# EAGLE board Shield Schematic (EAGLE 9.6.2)
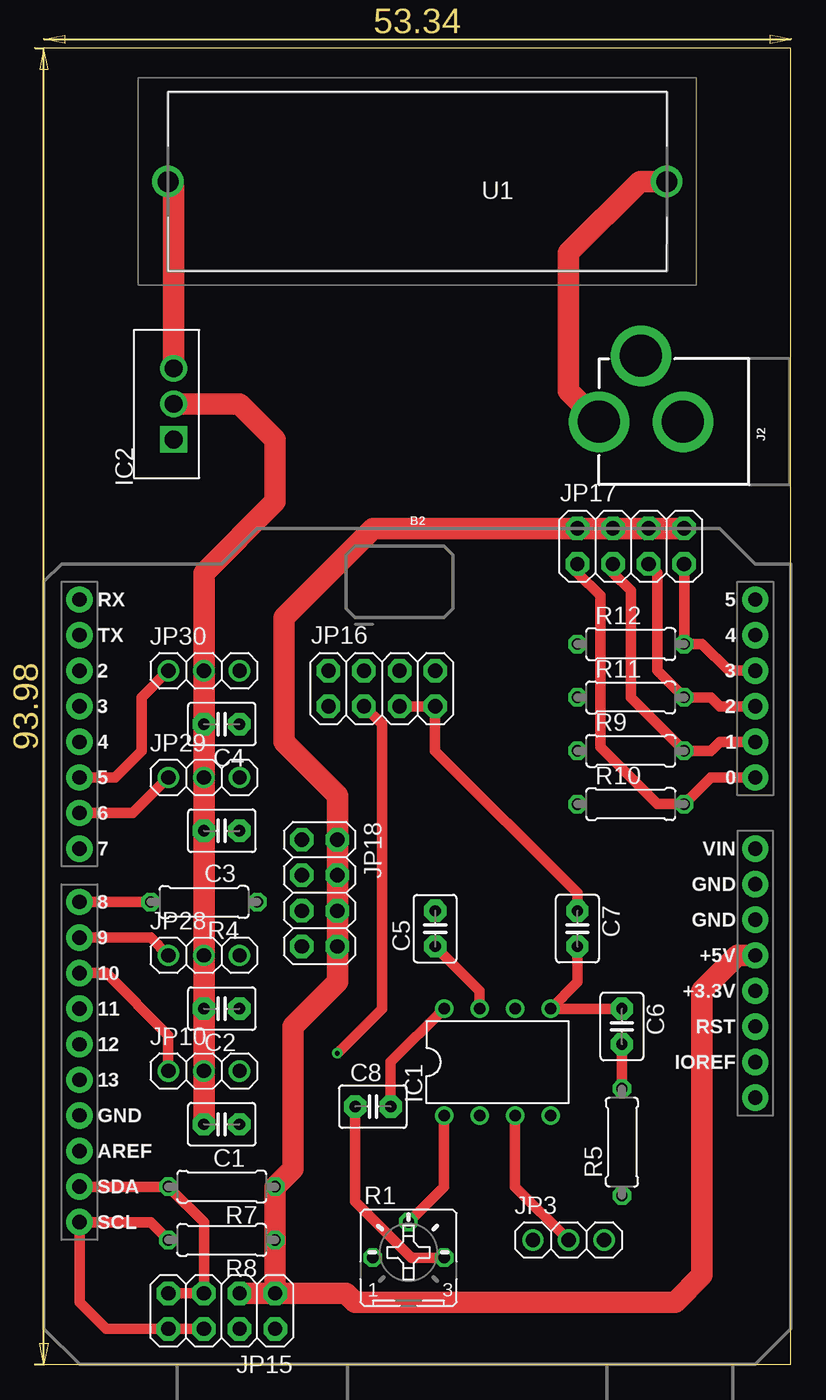
[diagram p0: board, top side]
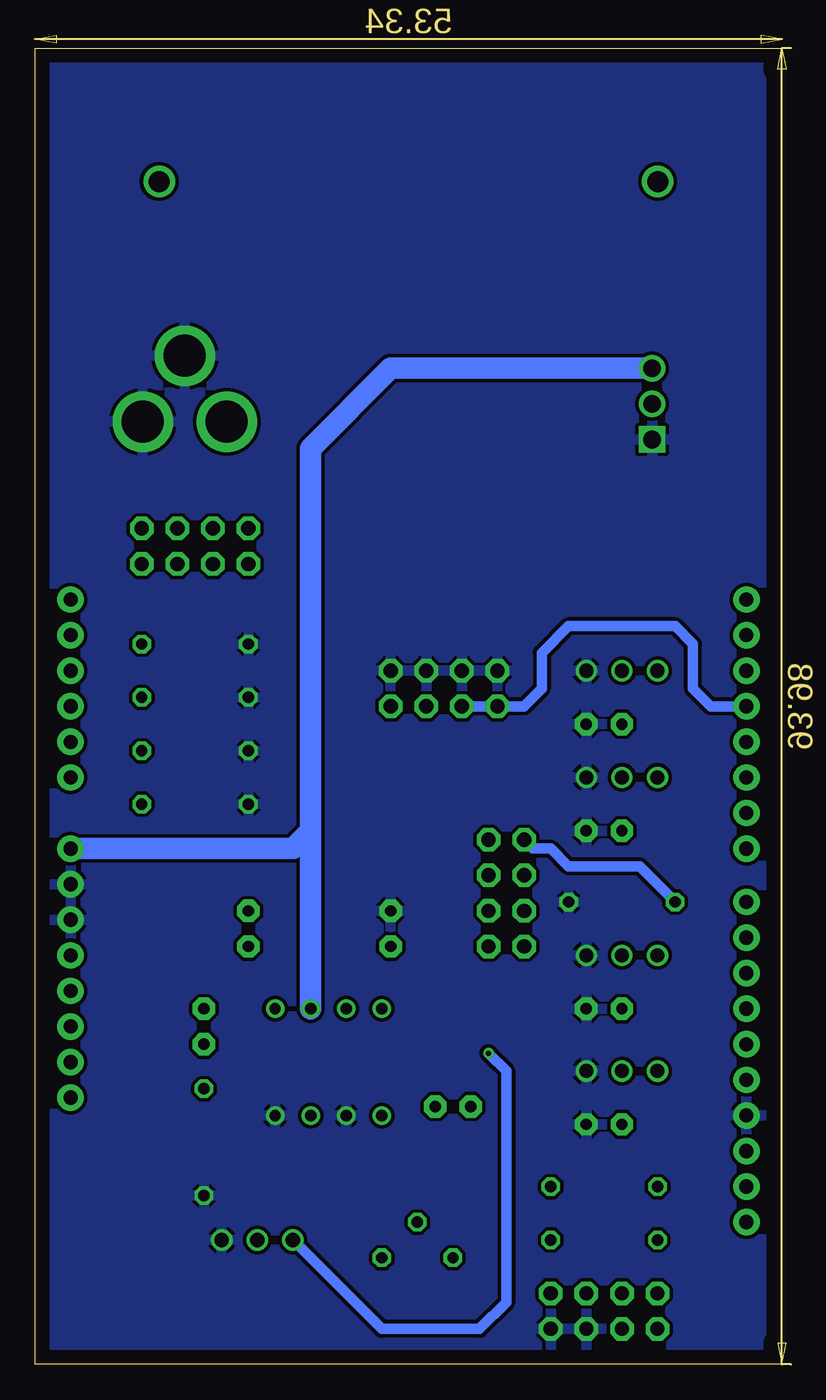
[diagram p1: board, bottom side, seen from below]

Size 53.34 x 93.98 mm. Coordinates in mm from the lower left corner, seen from the top.
Outline: 0,0 53.34,0 53.34,93.98 0,93.98 0,0
Copper layers (1*16): Top 0.035mm / dielectric 1.5mm / Bottom 0.035mm
Design rules "default": minimum track width 6mil, minimum drill 0.35mm, track to track 6mil, track to pad 6mil, pad to pad 6mil, via to via 6mil, smd to smd 6mil, copper to edge 40mil, drill to drill 6mil, minimum pad ring 10mil, minimum via ring 8mil, stop-mask expansion 4mil, vias tented up to drill 0mil, thermal gap 10mil
Net classes: 1 Signal: width 0.762 mm, clearance 0.152 mm; 2 Power: width 1.524 mm, clearance 0.254 mm; 3 Audio: width 0.762 mm, clearance 0.254 mm

## Footprints (pad centres in the part's own frame; a part is rotated, then mirrored left to right if it is on the bottom)
UNO_R3_SHIELD = drill 1.016 pad 1.88: 3.3V 24.13,-2.54; 5V 24.13,0; A0 24.13,12.7; A1 24.13,15.24; A2 24.13,17.78; A3 24.13,20.32; A4 24.13,22.86; A5 24.13,25.4; AREF -24.13,-13.97; D2 -24.13,20.32; D3 -24.13,17.78; D4 -24.13,15.24; D5 -24.13,12.7; D6 -24.13,10.16; D7 -24.13,7.62; D8 -24.13,3.81; D9 -24.13,1.27; D10 -24.13,-1.27; D11 -24.13,-3.81; D12 -24.13,-6.35; D13 -24.13,-8.89; GND@0 24.13,2.54; GND@1 24.13,5.08; GND@2 -24.13,-11.43; IOREF 24.13,-7.62; NC 24.13,-10.16; RES 24.13,-5.08; RX -24.13,25.4; SCL -24.13,-19.05; SDA -24.13,-16.51; TX -24.13,22.86; VIN 24.13,7.62
C2.5-3 = drill 0.813 pad 1.6 octagon: 1 -1.27,0; 2 1.27,0
DIL08 = drill 0.813 pad 1.27: 1 -3.81,-3.81; 2 -1.27,-3.81; 3 1.27,-3.81; 4 3.81,-3.81; 5 3.81,3.81; 6 1.27,3.81; 7 -1.27,3.81; 8 -3.81,3.81
TO254P470X1016X2222-3P = drill 1.27 pad 1.905 square: 1 -5.08,-1.016 | drill 1.27 pad 1.905: 2 -2.54,-1.016; 3 0,-1.016
POWER_JACK_PTH = drill 2.997 pad 4.318: GND 0,7.7; GNDBREAK 4.7,10.7; PWR 0,13.7
1X03 = drill 1.016: 1 -2.54,0; 2 0,0; 3 2.54,0
2X04 = drill 1.016 pad 1.676 octagon: 1 -3.81,-1.27; 2 -3.81,1.27; 3 -1.27,-1.27; 4 -1.27,1.27; 5 1.27,-1.27; 6 1.27,1.27; 7 3.81,-1.27; 8 3.81,1.27
B25P = drill 0.813 octagon: A -2.54,0; E 2.54,0; S 0,2.54
0207/7 = drill 0.813 octagon: 1 -3.81,0; 2 3.81,0
03540101ZXGY = drill 1.5 pad 2.25: 1 -17.8,0; 2 17.8,0

## Placement (x,y rotation side)
B2  ARDUINO_UNO_R3_SHIELDBASIC  [UNO_R3_SHIELD]  26.67,29.21 0 top
C1  [C2.5-3]  12.7,17.14 180 top
C2  [C2.5-3]  12.7,25.4 180 top
C3  [C2.5-3]  12.7,38.1 180 top
C4  [C2.5-3]  12.7,45.72 180 top
C5  [C2.5-3]  27.94,31.11 90 top
C6  [C2.5-3]  41.27,24.13 270 top
C7  [C2.5-3]  38.1,31.11 270 top
C8  [C2.5-3]  23.5,18.41 0 top
IC1  LM386N-1  [DIL08]  32.38,21.59 0 top
IC2  LM1085IT-5.0  [TO254P470X1016X2222-3P]  8.26,71.12 90 top
J2  POWER_JACK  [POWER_JACK_PTH]  53.34,67.31 90 top
JP3  [1X03]  37.47,8.89 0 top
JP10  [1X03]  11.43,20.95 0 top
JP15  [2X04]  12.7,3.81 180 top
JP16  [2X04]  24.13,48.26 0 top
JP17  [2X04]  41.91,58.42 0 top
JP18  [2X04]  19.68,33.66 270 top
JP28  [1X03]  11.43,29.21 0 top
JP29  [1X03]  11.43,41.91 0 top
JP30  [1X03]  11.43,49.53 0 top
R1  [B25P]  26.04,7.62 0 top
R4  [0207/7]  11.43,33.02 180 top
R5  [0207/7]  41.27,15.88 90 top
R7  [0207/7]  12.7,12.7 180 top
R8  [0207/7]  12.7,8.89 180 top
R9  [0207/7]  41.91,43.81 0 top
R10  [0207/7]  41.91,40.01 0 top
R11  [0207/7]  41.91,47.62 0 top
R12  [0207/7]  41.91,51.44 0 top
U1  03540001ZXGY  [03540101ZXGY]  26.67,84.45 180 top

## Library data of the parts
B2 = SparkFun-Boards
C1-C8 = capacitor-wima
IC1 = linear
IC2 = SamacSys_Parts; ARROW_PART_NUMBER: LM1085IT-5.0; ARROW_PRICE-STOCK: https://www.arrow.com/en/products/lm1085it-5.0/texas-instruments; DESCRIPTION: IC, LDO VOLT REG, 5V, 1.5A; HEIGHT: mm; MANUFACTURER_NAME: Texas Instruments; MANUFACTURER_PART_NUMBER: LM1085IT-5.0; MOUSER_PART_NUMBER: 926-LM1085IT-50; MOUSER_PRICE-STOCK: https://www.mouser.co.uk/ProductDetail/Texas-Instruments/LM1085IT-50?qs=X1J7HmVL2ZGujKIFphWZug%3D%3D
J2 = SparkFun-Connectors; PROD_ID: CONN-08197
JP3 JP10 JP15-JP18 JP28-JP30 = adafruit
R1 = pot
R4 R5 R7-R12 = resistor
U1 = SamacSys_Parts; ARROW_PART_NUMBER: 03540001ZXGY; ARROW_PRICE-STOCK: https://www.arrow.com/en/products/03540001zxgy/littelfuse; DESCRIPTION: Littelfuse 30A Panel Mount 6.3 x 32mm Cartridge Fuse Block, 300V ac/dc; HEIGHT: 13mm; MANUFACTURER_NAME: LITTELFUSE; MANUFACTURER_PART_NUMBER: 03540001ZXGY; MOUSER_PART_NUMBER: 576-03540001ZXGY; MOUSER_PRICE-STOCK: https://www.mouser.co.uk/ProductDetail/Littelfuse/03540001ZXGY?qs=2VFNtWizgieffhgauIF6XA%3D%3D

## Nets
+5V_SERVO [Power]: C1.2 C2.2 C3.2 C4.2 IC2.2 JP10.2 JP28.2 JP29.2 JP30.2
+5V_UNO [Power]: B2.5V JP15.1 JP15.3 JP17.2 JP17.4 JP17.6 JP17.8 JP18.2 JP18.4 JP18.6 JP18.8 R7.1 R8.1
+12V [Power]: B2.VIN IC1.6 IC2.3 U1.2
ACTION_BUTTON [Signal]: B2.A3 JP17.7 R12.2
GND [Power]: B2.GND@0 B2.GND@1 B2.GND@2 C1.1 C2.1 C3.1 C4.1 C5.2 IC1.2 IC1.4 IC2.1 J2.GND J2.GNDBREAK JP3.3 JP10.3 JP15.2 JP15.4 JP16.2 JP16.4 JP16.6 JP16.8 JP28.3 JP29.3 JP30.3 R4.1 R5.1 R9.1 R10.1 R11.1 R12.1
N$1 [Power]: J2.PWR U1.1
N$5 [Audio]: C6.1 C7.2 IC1.5
N$8 [Audio]: C6.2 R5.2
N$9 [Audio]: C5.1 IC1.7
N$11 [Audio]: C8.2 IC1.8
N$12 [Audio]: C8.1 R1.E
N$13 [Audio]: IC1.1 R1.S
PLAYLIVE_SWITCH [Signal]: B2.A1 JP17.3 R9.2
PLAYRECORDING_SWITCH [Signal]: B2.A2 JP17.5 R11.2
POT_OUT [Audio]: IC1.3 JP3.2
RECORD_SWITCH [Signal]: B2.A0 JP17.1 R10.2
RESET_BUTTON [Signal]: B2.D8 JP18.1 R4.2
SCL [Signal]: B2.SCL JP15.6 JP15.8 R8.2
SDA [Signal]: B2.SDA JP15.5 JP15.7 R7.2
SERVO1 [Signal]: B2.D5 JP30.1
SERVO2 [Signal]: B2.D6 JP29.1
SERVO3 [Signal]: B2.D9 JP28.1
SERVO4 [Signal]: B2.D10 JP10.1
SPEAKER [Audio]: C7.1 JP16.5 JP16.7
TONE_IN [Audio]: B2.D3 JP3.1 JP16.1 JP16.3

## Tracks (layer width: path | path; a pad name or v marks a point on that pad's centre or on a via)
+5V_SERVO
  Top 1.524: C1.2 JP10.2 C2.2 JP28.2 C3.2 JP29.2 C4.2 JP30.2 11.43,56.52 16.51,61.59 16.51,66.04 13.97,68.58 IC2.2
+5V_UNO
  Top 1.524: JP15.3 JP15.1 | JP15.1 R8.1 R7.1 17.78,13.97 17.78,24.13 20.95,27.3 JP18.8 JP18.6 JP18.4 JP18.2 20.95,40.64 17.14,44.45 17.14,53.34 23.5,59.69 JP17.2 JP17.4 JP17.6 JP17.8 | B2.5V 49.53,29.21 46.99,26.67 46.99,6.35 45.09,4.45 22.23,4.45 21.59,5.08 JP15.1
+12V
  Top 1.524: U1.2 9.27,84.05 IC2.3
  Bottom 1.524: 33.66,38.1 33.66,65.41 27.94,71.12 IC2.3 | 33.66,38.1 IC1.6 | B2.VIN 34.92,36.83 33.66,38.1
ACTION_BUTTON
  Top 0.762: B2.A3 48.9,49.53 46.99,51.44 R12.2 JP17.7
GND
  pour Bottom: 0,93.98 0,0 53.34,0 53.34,93.98
N$1
  Top 1.524: J2.PWR 37.47,69.48 37.47,79.38 42.55,84.45 U1.1
N$5
  Top 0.762: C6.1 IC1.5 38.1,27.3 C7.2
N$8
  Top 0.762: C6.2 R5.2
N$9
  Top 0.762: IC1.7 31.11,26.67 C5.1
N$11
  Top 0.762: IC1.8 24.77,21.59 C8.2
N$12
  Top 0.762: C8.1 22.23,11.65 26.25,7.62 R1.E
N$13
  Top 0.762: R1.S 28.57,12.7 IC1.1
PLAYLIVE_SWITCH
  Top 0.762: B2.A1 48.26,44.45 47.62,43.81 R9.2 41.91,47.62 41.91,55.24 40.64,56.52 JP17.3
PLAYRECORDING_SWITCH
  Top 0.762: B2.A2 48.26,46.99 47.62,47.62 R11.2 43.81,49.53 43.81,56.52 JP17.5
POT_OUT
  Top 0.762: IC1.3 33.66,12.7 JP3.2
RECORD_SWITCH
  Top 0.762: B2.A0 47.62,41.91 R10.2 43.81,40.01 39.73,44.09 39.73,54.89 38.1,56.52 JP17.1
RESET_BUTTON
  Top 0.762: B2.D8 R4.2
  Bottom 0.762: R4.2 10.16,35.56 15.24,35.56 16.51,36.83 17.78,36.83 JP18.1
SCL
  Top 0.762: R8.2 7.62,10.16 B2.SCL 2.54,4.45 4.45,2.54 JP15.8 JP15.6
SDA
  Top 0.762: B2.SDA R7.2 11.43,10.16 JP15.5 JP15.7
SERVO1
  Top 0.762: JP30.1 6.99,47.62 6.99,43.81 5.08,41.91 B2.D5
SERVO2
  Top 0.762: JP29.1 6.35,39.37 B2.D6
SERVO3
  Top 0.762: B2.D9 7.62,30.48 JP28.1
SERVO4
  Top 0.762: B2.D10 4.45,27.94 8.89,23.5 JP10.1
SPEAKER
  Top 0.762: C7.1 38.1,33.66 27.94,43.81 JP16.7 JP16.5
TONE_IN  (via drill 0.35)
  Top 0.762: JP16.3 24.13,45.72 24.13,25.4 v20.95,22.23
  Bottom 0.762: B2.D3 5.08,46.99 6.35,48.26 6.35,51.44 7.62,52.7 15.24,52.7 17.14,50.8 17.14,48.26 18.41,46.99 JP16.1 JP16.3 | v20.95,22.23 19.68,20.95 19.68,4.45 21.59,2.54 28.57,2.54 JP3.1